# EAGLE board LockBox (EAGLE 7.1.0)
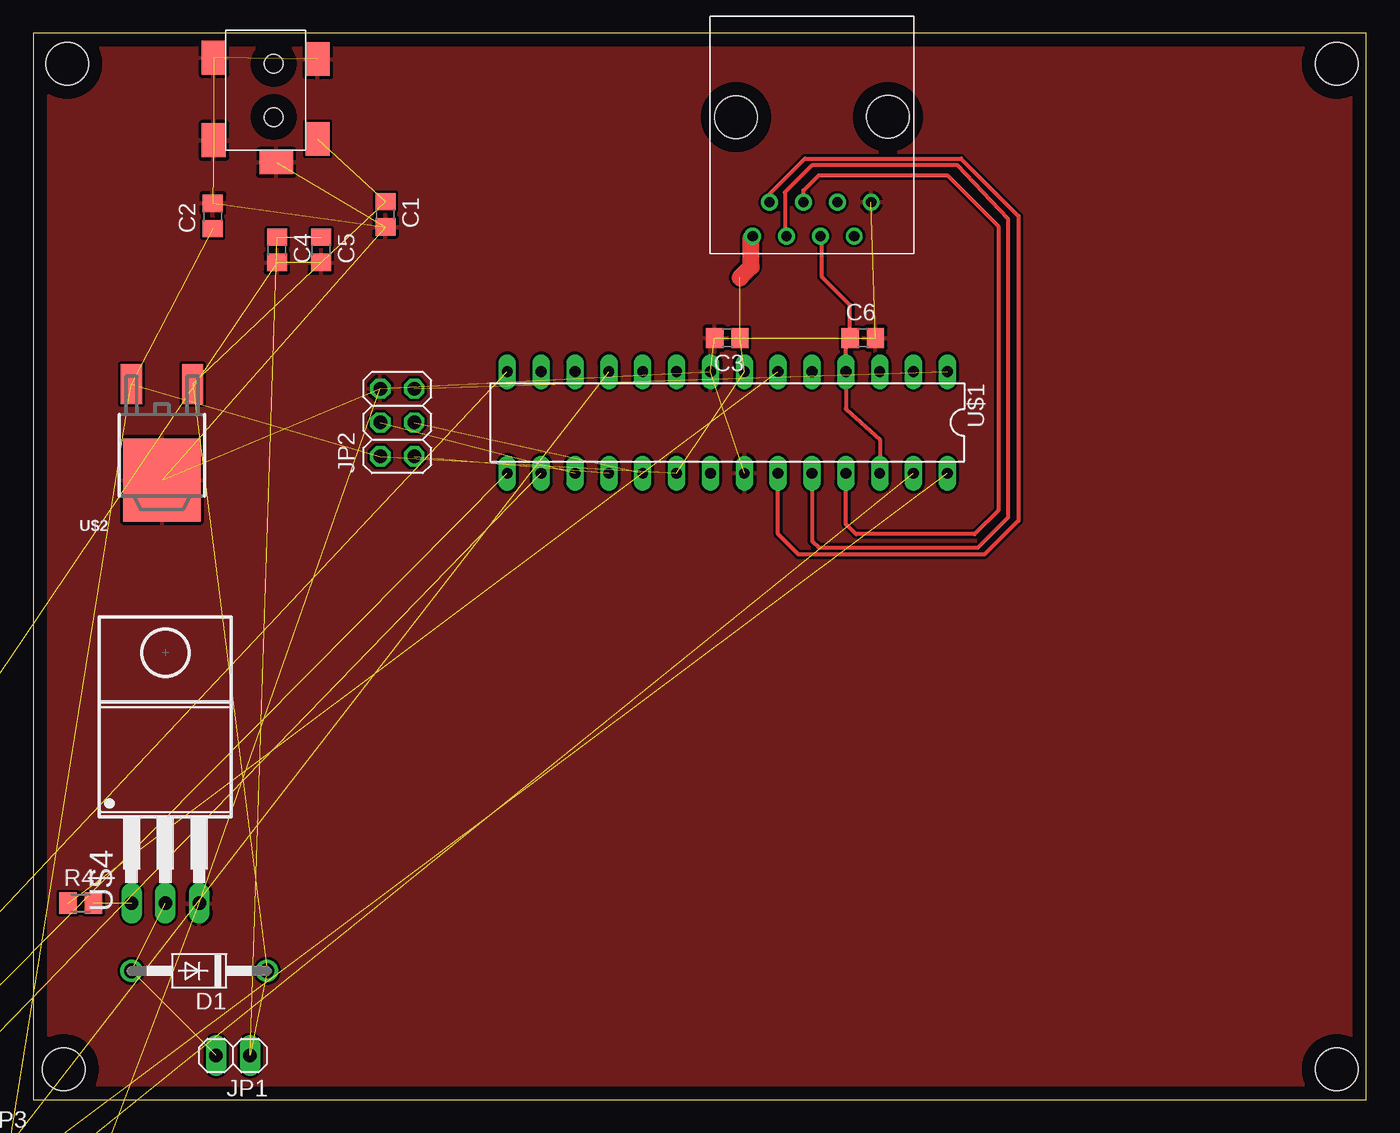
[diagram p0: board, top side]

Size 100 x 80 mm. Coordinates in mm from the lower left corner, seen from the top.
Outline: 0,0 100,0 100,80 0,80 0,0
Copper layers (1*16): Top 0.035mm / dielectric 1.5mm / Bottom 0.035mm
Design rules "default": minimum track width 10mil, minimum drill 24mil, track to track 8mil, track to pad 8mil, pad to pad 8mil, via to via 8mil, smd to smd 8mil, copper to edge 40mil, drill to drill 8mil, minimum pad ring 10mil, minimum via ring 8mil, stop-mask expansion 4mil, vias tented up to drill 0mil, thermal gap 10mil
Holes 3.2 mm at 2.54,77.72 2.29,2.29 97.79,2.29 97.79,77.72

## Footprints (pad centres in the part's own frame; a part is rotated, then mirrored left to right if it is on the bottom)
C0805 = smd 1.3 x 1.5: 1 -0.95,0; 2 0.95,0
DO41-10 = drill 1.118: A 5.08,0; C -5.08,0
1X02 = drill 1.016 long: 1 -1.27,0; 2 1.27,0
2X03 = drill 1.016 octagon: 1 -2.54,-1.27; 2 -2.54,1.27; 3 0,-1.27; 4 0,1.27; 5 2.54,-1.27; 6 2.54,1.27
2X04 = drill 1.016 octagon: 1 -3.81,-1.27; 2 -3.81,1.27; 3 -1.27,-1.27; 4 -1.27,1.27; 5 1.27,-1.27; 6 1.27,1.27; 7 3.81,-1.27; 8 3.81,1.27
R0805 = smd 1.3 x 1.5: 1 -0.95,0; 2 0.95,0
M0805 = smd 1.3 x 1.6: 1 -0.95,0; 2 0.95,0
TO92-BCE = drill 0.813 long: B 0,0; C 2.54,0; E -2.54,0
DIL28-3 = drill 0.813 long: 1 -16.51,-3.81; 2 -13.97,-3.81; 3 -11.43,-3.81; 4 -8.89,-3.81; 5 -6.35,-3.81; 6 -3.81,-3.81; 7 -1.27,-3.81; 8 1.27,-3.81; 9 3.81,-3.81; 10 6.35,-3.81; 11 8.89,-3.81; 12 11.43,-3.81; 13 13.97,-3.81; 14 16.51,-3.81; 15 16.51,3.81; 16 13.97,3.81; 17 11.43,3.81; 18 8.89,3.81; 19 6.35,3.81; 20 3.81,3.81; 21 1.27,3.81; 22 -1.27,3.81; 23 -3.81,3.81; 24 -6.35,3.81; 25 -8.89,3.81; 26 -11.43,3.81; 27 -13.97,3.81; 28 -16.51,3.81
DPAK = smd 1.6 x 3: 1 -2.3,-7.2; 3 2.3,-7.2 | smd 5.8 x 6.2: 4 0,0
PWR_JACK = smd 2.54 x 1.8: 1 5.65,3.3; 2 5.75,-4.5; P$1 -0.35,3.3; P$5 -0.45,-4.5 | smd 1.8 x 2.54: 3 7.4,0.2 | hole 1.4: 0,0; 4,0
T0220-3 = drill 1.016 long: 1 -2.54,-11.43; 2 0,-11.43; 3 2.54,-11.43
MODJACK8 = drill 0.76: P$1 4.45,16.5; P$2 3.18,13.96; P$3 1.91,16.5; P$4 0.64,13.96; P$5 -0.63,16.5; P$6 -1.9,13.96; P$7 -3.17,16.5; P$8 -4.44,13.96 | hole 3.2: 5.71,7.58; -5.7,7.55

## Placement (x,y rotation side)
C1  330pF, 24V  [C0805]  26.42,66.42 270 top
C2  10uF, 7V  [C0805]  13.46,66.29 90 top
C3  1uF  [C0805]  52.07,57.15 180 top
C4  10uF  [C0805]  18.29,63.75 270 top
C5  1uF  [C0805]  21.59,63.75 270 top
C6  1uF  [C0805]  62.23,57.15 0 top
D1  1N4004  [DO41-10]  12.45,9.65 180 top
JP1  Sol_ctrl  [1X02]  14.99,3.3 180 top
JP2  ICSP  [2X03]  27.3,50.8 90 top
JP3  LCD  [2X04]  1.52,-5.33 0 top  (outside the outline)
R1  10k  [R0805]  -27.43,-13.46 0 top  (outside the outline)
R2  10k  [R0805]  -27.43,-17.53 0 top  (outside the outline)
R3  10k  [R0805]  -27.43,-21.59 0 top  (outside the outline)
R4  1k  [M0805]  3.56,14.73 0 top
R5  150  [R0805]  -27.43,-25.65 0 top  (outside the outline)
R6  33  [R0805]  -27.43,-29.72 0 top  (outside the outline)
R7  27  [R0805]  -27.43,-33.78 0 top  (outside the outline)
R8  10k  [R0805]  -27.43,-39.88 0 top  (outside the outline)
R9  4.7k  [R0805]  -27.43,-43.94 0 top  (outside the outline)
R10  4.7k  [R0805]  -27.43,-48.01 0 top  (outside the outline)
T1  2N3904  [TO92-BCE]  -9.14,-6.35 0 top  (outside the outline)
T2  2N3904  [TO92-BCE]  -17.53,-6.35 0 top  (outside the outline)
T3  2N3904  [TO92-BCE]  -25.91,-6.35 0 top  (outside the outline)
U$1  ATMEGA328  [DIL28-3]  52.07,50.8 180 top
U$2  LD29150DT33R  [DPAK]  9.65,46.48 180 top
U$3  PJ_075DH  [PWR_JACK]  18.03,77.72 270 top
U$4  TIP120  [T0220-3]  9.91,26.16 0 top
U$6  ETHERNET_JACK  [MODJACK8]  58.42,81.28 180 top

## Library data of the parts
C1-C6 = LockBox; SPICEMODEL: NONE; SPICEPREFIX: C
D1 JP1-JP3 R1-R10 T1-T3 U$6 = LockBox
U$1 = LockBox; DIGIKEY: http://www.digikey.com/product-detail/en/ATMEGA328-PU/ATMEGA328-PU-ND/2271026; PB0: GPIO; PB1: GPIO; PB2: GPIO; PB3: MOSI; PB4: MISO; PB5: SCK; PC4: SDA; PC5: SCL; PC6: RESET; PD2: INT0; PD4: GPIO; PD5: GPIO
U$2 = LockBox; DIGIKEY: 497-3468-1-ND; VOUT: 3.3V
U$3 = LockBox; CURRENT: 3.5A; PINDIAMETER: 1.3mm; VOLTAGE: 16V
U$4 = LockBox; DIGIKEY: TIP120TUFS-ND; MFG: Fairchild

## Nets
3.3V: C2.1 C3.1 JP2.2 JP3.1 R8.2 R9.2 R10.2 U$1.7 U$1.20 U$2.3 U$6.P$1
!RST: JP2.5 U$1.1
+12V: C1.1 C4.1 C5.1 D1.C JP1.1 U$2.1 U$3.1
A0: U$1.23 U$6.P$2
A1: U$1.24 U$6.P$3
A2: U$1.25 U$6.P$4
AREF: U$1.21
BLUE: R3.1 U$1.16
EN_BL: JP3.3 R7.2
EN_GR: JP3.5 R6.2
EN_RD: JP3.7 R5.2
GND: C1.2 C2.2 C3.2 C4.2 C5.2 C6.2 JP2.6 JP3.8 T1.E T2.E T3.E U$1.8 U$1.22 U$2.4 U$3.2 U$3.3 U$3.P$1 U$3.P$5 U$4.3 U$6.P$8
GREEN: R2.1 U$1.15
LCD_RST: JP3.2 R8.1 U$1.11
MISO: JP2.1 U$1.18
MOSI: JP2.4 U$1.17
N$1: R4.2 U$4.1
N$5: D1.A JP1.2 U$4.2
N$6: R1.2 T1.B
N$7: R2.2 T2.B
N$8: R3.2 T3.B
N$10: R7.1 T3.C
N$11: R6.1 T2.C
N$12: R5.1 T1.C
RED: R1.1 U$1.14
SCK: JP2.3 U$1.19
SCL: JP3.4 R9.1 U$1.28
SDA: JP3.6 R10.1 U$1.27
SOL_EN: R4.1 U$1.6
START: C6.1 U$1.4 U$1.26 U$6.P$5

## Tracks (layer width: path | path; a pad name or v marks a point on that pad's centre or on a via)
3.3V  (10 unrouted)
  Top 1.27: 53.02,61.66 53.85,62.48 53.85,64.66 U$6.P$1
!RST  (1 unrouted)
+12V  (6 unrouted)
A0
  Top 0.305: U$6.P$2 55.24,67.94 57.91,70.61 69.6,70.61 73.91,66.29 73.91,43.43 71.37,40.89 57.4,40.89 55.88,42.42 U$1.23
A1
  Top 0.305: U$1.24 58.42,41.91 58.93,41.4 70.87,41.4 73.15,43.69 73.15,66.04 69.34,70.1 58.42,70.1 56.39,68.07 56.39,64.9 U$6.P$3
A2
  Top 0.305: U$6.P$4 57.78,68.19 58.93,69.34 68.58,69.34 72.39,65.53 72.39,44.2 70.61,42.42 61.72,42.42 60.96,43.18 U$1.25
BLUE  (1 unrouted)
EN_BL  (1 unrouted)
EN_GR  (1 unrouted)
EN_RD  (1 unrouted)
GND  (19 unrouted)
  pour Top (rank 3): 0,80.26 0,0 100.08,0 100.08,80.26
GREEN  (1 unrouted)
LCD_RST  (2 unrouted)
MISO  (1 unrouted)
MOSI  (1 unrouted)
N$1  (1 unrouted)
N$5  (2 unrouted)
N$6  (1 unrouted)
N$7  (1 unrouted)
N$8  (1 unrouted)
N$10  (1 unrouted)
N$11  (1 unrouted)
N$12  (1 unrouted)
RED  (1 unrouted)
SCK  (1 unrouted)
SCL  (2 unrouted)
SDA  (2 unrouted)
SOL_EN  (1 unrouted)
START
  Top 0.305: U$1.26 63.5,49.53 60.96,51.82 U$1.4 60.96,56.83 C6.1 61.28,59.62 59.18,61.72 59.18,64.65 U$6.P$5